# EAGLE board ledboard_segment (EAGLE 7.1.0)
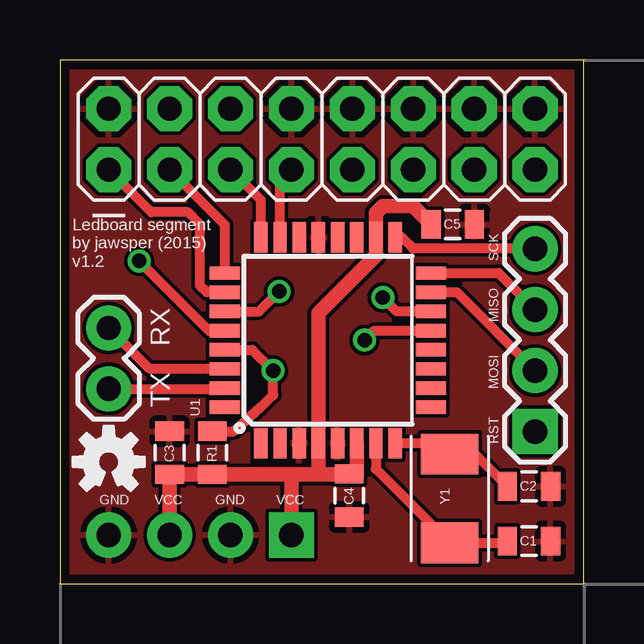
[diagram p0: board, top side]
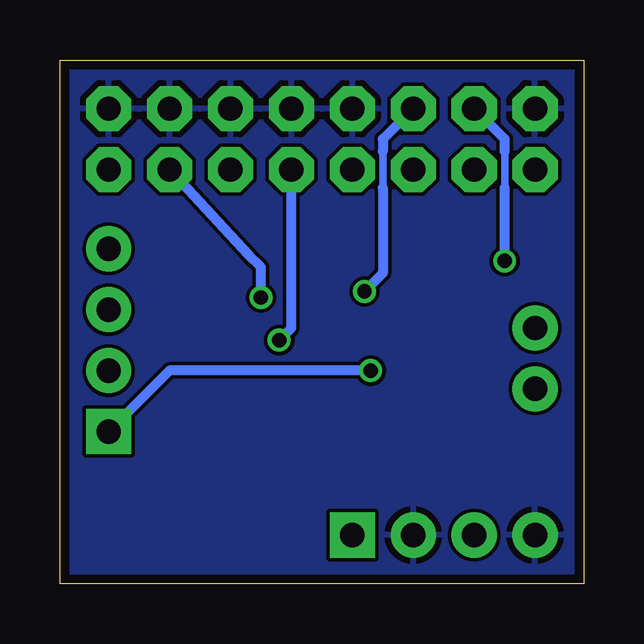
[diagram p1: board, bottom side, seen from below]

Size 21.84 x 21.84 mm. Coordinates in mm from the lower left corner, seen from the top.
Outline: 0,0 21.84,0 21.84,21.84 0,21.83 0,0
Copper layers (1*16): Top 0.0356mm / dielectric 1.5011mm / Bottom 0.0356mm
Design rules "LaenPCBOrder": minimum track width 6mil, minimum drill 13mil, track to track 6mil, track to pad 6mil, pad to pad 6mil, via to via 6mil, smd to smd 6mil, copper to edge 15mil, drill to drill 6mil, minimum pad ring 7mil, minimum via ring 7mil, stop-mask expansion 3mil, vias tented up to drill 0mil, thermal gap 10mil

## Footprints (pad centres in the part's own frame; a part is rotated, then mirrored left to right if it is on the bottom)
0805 = smd 0.8 x 1.2: 1 -0.9,0; 2 0.9,0
1X04 = drill 1.016 pad 1.88 square: 1 0,0 | drill 1.016 pad 1.88: 2 2.54,0; 3 5.08,0; 4 7.62,0
1X02 = drill 1.016 pad 1.88: 1 0,0; 2 2.54,0
1X04_NO_SILK = drill 1.016 pad 1.88 square: 1 0,0 | drill 1.016 pad 1.88: 2 2.54,0; 3 5.08,0; 4 7.62,0
TQFP32-08 = smd 1.27 x 0.559: 1 -4.293,2.8; 2 -4.293,2; 3 -4.293,1.2; 4 -4.293,0.4; 5 -4.293,-0.4; 6 -4.293,-1.2; 7 -4.293,-2; 8 -4.293,-2.8; 17 4.293,-2.8; 18 4.293,-2; 19 4.293,-1.2; 20 4.293,-0.4; 21 4.293,0.4; 22 4.293,1.2; 23 4.293,2; 24 4.293,2.8 | smd 0.559 x 1.27: 9 -2.8,-4.293; 10 -2,-4.293; 11 -1.2,-4.293; 12 -0.4,-4.293; 13 0.4,-4.293; 14 1.2,-4.293; 15 2,-4.293; 16 2.8,-4.293; 25 2.8,4.293; 26 2,4.293; 27 1.2,4.293; 28 0.4,4.293; 29 -0.4,4.293; 30 -1.2,4.293; 31 -2,4.293; 32 -2.8,4.293
2X8 = drill 1.016 pad 1.88 octagon: 1 0,0; 2 0,2.54; 3 2.54,0; 4 2.54,2.54; 5 5.08,0; 6 5.08,2.54; 7 7.62,0; 8 7.62,2.54; 9 10.16,0; 10 10.16,2.54; 11 12.7,0; 12 12.7,2.54; 13 15.24,0; 14 15.24,2.54; 15 17.78,0; 16 17.78,2.54
CRYSTAL-TXC-7A = smd 1.7 x 2.4: P$1 1.85,0; P$2 -1.85,0

## Placement (x,y rotation side)
C1  22pF  [0805]  19.56,1.78 180 top
C2  22pF  [0805]  19.56,4.06 180 top
C3  10uF  [0805]  4.57,5.46 90 top
C4  1uF  [0805]  12.07,3.68 270 top
C5  1uF  [0805]  16.38,14.99 0 top
J1  ISP  [1X04]  19.81,6.35 90 top
JP1  M02PTH  [1X02]  2.03,10.67 270 top
JP2  M02POLAR  [1X04_NO_SILK]  9.65,2.03 180 top
R1  10k  [0805]  6.35,5.46 90 top
U1  ATMEGA328P_TQFP  [TQFP32-08]  11.18,10.16 90 top
U$1  M08X2  [2X8]  2.03,17.27 0 top
U$2  [OSHW-LOGO-S]  2.03,5.08 0 top
Y1  16MHz  [CRYSTAL-TXC-7A]  16.26,3.56 90 top

## Library data of the parts
C1-C5 R1 = SparkFun-Passives
J1 JP1 JP2 U$1 = SparkFun-Connectors
U1 = SparkFun-DigitalIC; PROD_ID: IC-09069
U$2 = SparkFun-Aesthetics
Y1 = SparkFun-FreqCtrl

## Nets
A0: U1.25 U$1.3
A1: U1.24 U$1.5
A2: U1.23 U$1.7
CLK: U1.26 U$1.1
GND: C1.1 C2.1 C3.2 C4.2 C5.2 JP2.2 JP2.4 U1.3 U1.5 U1.21 U$1.2 U$1.8 U$1.10 U$1.12 U$1.14 U$1.16
LDAT: U1.14 U$1.13
MISO: J1.3 U1.16
MOSI: J1.2 U1.15
OE: U1.27 U$1.6
RESET: J1.1 R1.2 U1.29
RXD: JP1.1 U1.30
SCK: J1.4 U1.17
STROBE: U1.28 U$1.4
TXD: JP1.2 U1.31
UDAT: U1.13 U$1.9
VCC: C3.1 C4.1 C5.1 JP2.1 JP2.3 R1.1 U1.4 U1.6 U1.18
XTAL1: C1.2 U1.7 Y1.P$2
XTAL2: C2.2 U1.8 Y1.P$1

## Tracks (layer width: path | path; a pad name or v marks a point on that pad's centre or on a via)
A0
  Top 0.406: U1.25 6.88,14.96 U$1.3
A1
  Top 0.406: U1.24 8.38,16.01 U$1.5
A2
  Top 0.406: U1.23 9.18,16.8 U$1.7
CLK
  Top 0.406: U1.26 6.13,12.16 5.84,12.45 5.84,14.99 5.33,15.49 3.81,15.49 U$1.1
GND
  pour Bottom: 0,21.84 21.84,21.84 21.84,-0.25 0,-0.25
  pour Top: -0.25,22.1 22.1,22.1 22.1,-0.51 -0.76,-0.51 -1.02,-0.25
LDAT  (via drill 0.6)
  Top 0.406: U1.14 14.04,11.36 v13.46,11.94
  Bottom 0.406: U$1.13 13.97,13.72 13.46,13.21 v13.46,11.94
MISO
  Top 0.406: U1.16 18.28,12.96 J1.3
MOSI
  Top 0.406: U1.15 16.54,12.16 J1.2
OE  (via drill 0.6)
  Top 0.406: U1.27 8.31,11.36 v9.14,12.19
  Bottom 0.305: 8.38,18.03 8.38,16.51
  Bottom 0.406: U$1.6 8.38,18.54 8.38,18.03 | 8.38,16.51 8.38,12.95 v9.14,12.19
RESET  (via drill 0.6)
  Top 0.406: U1.29 8.02,9.76 v8.89,8.89 8.89,7.87 8.38,7.37 7.25,6.36 R1.2
  Bottom 0.406: v8.89,8.89 17.27,8.89 J1.1
RXD
  Top 0.406: U1.30 3.74,8.96 JP1.1
SCK
  Top 0.406: J1.4 14.73,13.97 14.22,14.48 14,14.48 U1.17
STROBE  (via drill 0.6)
  Top 0.406: U1.28 6.2,10.56 v3.3,13.46
  Bottom 0.305: 3.3,16.51 3.3,18.03
  Bottom 0.406: v3.3,13.46 3.3,16.51 | 3.3,18.03 3.3,18.54 U$1.4
TXD
  Top 0.406: JP1.2 6.85,8.13 U1.31
UDAT  (via drill 0.6)
  Top 0.406: v12.7,10.16 13.1,10.56 U1.13
  Bottom 0.406: U$1.9 12.19,10.67 v12.7,10.16
VCC
  Top 0.61: JP2.3 C3.1 R1.1 9.65,4.56 | 9.65,4.56 10.92,4.56 | 10.92,4.56 12.04,4.56 C4.1 12.38,4.51 U1.6 | 10.92,4.56 10.78,4.58 U1.4 10.78,11.28 13.18,13.68 U1.18 13.18,15.46 13.46,15.75 14.72,15.75 C5.1 | JP2.1 9.65,4.56
XTAL1
  Top 0.406: U1.7 13.18,4.79 Y1.P$2 18.59,1.71 C1.2
XTAL2
  Top 0.406: U1.8 15.79,5.87 Y1.P$1 17.32,5.41 C2.2

## Text on the board
tNames: _ | Ledboard segment / by jawsper (2015) / v1.2 | SCK | MISO | RX | MOSI | TX | RST | GND | VCC | GND | VCC